# EAGLE board ZED-F9P FeatherWing Paste (EAGLE 9.4.1)
REV: C

Size 50.8 x 22.86 mm. Coordinates in mm from the lower left corner, seen from the top.
Outline: 48.26,22.86 arc-90 50.8,20.32 50.8,2.54 arc-90 48.26,0
Copper layers (1*16): Top 0.018mm / dielectric 1.55mm / Bottom 0.018mm
Design rules "Multi-CB_2L_125um-Tracks_OL35um *": minimum track width 0.125mm, minimum drill 0.2mm, track to track 0.125mm, track to pad 0.125mm, pad to pad 0.125mm, via to via 0.125mm, smd to smd 0mil, copper to edge 0.2mm, drill to drill 0.2mm, minimum pad ring 0.125mm, minimum via ring 0.125mm, stop-mask expansion 2mil, vias tented up to drill 0.45mm, thermal gap 0.2mm
Net classes: 2 3.3V: width 0.508 mm

## Footprints (pad centres in the part's own frame; a part is rotated, then mirrored left to right if it is on the bottom)
SOLDERJUMPER_ARROW_NOPASTE = smd 0.762 x 1.524: 1 -1.016,0; 2 1.016,0
1X01 = drill 1.016 pad 1.93 octagon: 1 0,0
0805-NO = smd 1.24 x 1.5: 1 -0.95,0; 2 0.95,0
0603 = smd 1.1 x 1: 1 -0.85,0; 2 0.85,0
MICROBUILDER_FCI_10103594_CORRECTED = smd 1.425 x 2.5: BASE@1 -0.963,1.45; BASE@2 0.963,1.45 | smd 0.4 x 1.75: D+ 0,4.525; D- -0.65,4.525; GND 1.3,4.525; ID 0.65,4.525; VBUS -1.3,4.525 | drill 0.7 pad 1.25 square: SPRT@1 -2.736,1.679; SPRT@2 2.736,1.679 | drill 0.65 pad 1.016 square: SPRT@3 -2.426,4.747; SPRT@4 2.426,4.747
SOD-323 = smd 0.63 x 0.83: A 1.15,0; C -1.15,0
FIDUCIAL_1MM = smd 1 x 1: 1 0,0
SOLDERJUMPER_CLOSEDWIRE = smd 1.168 x 1.6: 1 -0.762,0; 2 0.762,0 | smd 0.635 x 0.203: WIRE 0,0
1X02_ROUND = drill 1 pad 1.778: 1 -1.27,0; 2 1.27,0
CHIPLED_0805_NOOUTLINE = smd 1.2 x 1.2: A 0,-1.05; C 0,1.05
MICROBUILDER_FEATHERWING_HOLES = drill 1 pad 1.778: 1 6.35,1.27; 2 8.89,1.27; 3 11.43,1.27; 4 13.97,1.27; 5 16.51,1.27; 6 19.05,1.27; 7 21.59,1.27; 8 24.13,1.27; 9 26.67,1.27; 10 29.21,1.27; 11 31.75,1.27; 12 34.29,1.27; 13 36.83,1.27; 14 39.37,1.27; 15 41.91,1.27; 16 44.45,1.27; 17 44.45,21.59; 18 41.91,21.59; 19 39.37,21.59; 20 36.83,21.59; 21 34.29,21.59; 22 31.75,21.59; 23 29.21,21.59; 24 26.67,21.59; 25 24.13,21.59; 26 21.59,21.59; 27 19.05,21.59; 28 16.51,21.59 | hole 2.54: 48.26,20.32; 48.26,2.54; 2.54,20.32; 2.54,2.54
SOT23-R = smd 0.635 x 1.016: 1 -0.95,-1; 2 0.95,-1; 3 0,1
0603-NO = smd 1.075 x 1: 1 -0.85,0; 2 0.85,0
TESTPOINT_ROUND_1.5MM = smd 1.5 x 1.5: P$1 0,0
ZED-F9P_ZED-F9P = smd 0.85 x 1.52: 1 -7.15,-7.45; 2 -6.05,-7.45; 3 -4.95,-7.45; 4 -3.85,-7.45; 5 -2.75,-7.45; 6 -1.65,-7.45; 7 -0.55,-7.45; 8 0.55,-7.45; 9 1.65,-7.45; 10 2.75,-7.45; 11 3.85,-7.45; 12 4.95,-7.45; 13 6.05,-7.45; 14 7.15,-7.45; 28 7.15,7.45; 29 6.05,7.45; 30 4.95,7.45; 31 3.85,7.45; 32 2.75,7.45; 33 1.65,7.45; 34 0.55,7.45; 35 -0.55,7.45; 36 -1.65,7.45; 37 -2.75,7.45; 38 -3.85,7.45; 39 -4.95,7.45; 40 -6.05,7.45; 41 -7.15,7.45 | smd 1.52 x 0.85: 15 9.95,-6.6; 16 9.95,-5.5; 17 9.95,-4.4; 18 9.95,-3.3; 19 9.95,-2.2; 20 9.95,-1.1; 21 9.95,0; 22 9.95,1.1; 23 9.95,2.2; 24 9.95,3.3; 25 9.95,4.4; 26 9.95,5.5; 27 9.95,6.6; 42 -9.95,6.6; 43 -9.95,5.5; 44 -9.95,4.4; 45 -9.95,3.3; 46 -9.95,2.2; 47 -9.95,1.1; 48 -9.95,0; 49 -9.95,-1.1; 50 -9.95,-2.2; 51 -9.95,-3.3; 52 -9.95,-4.4; 53 -9.95,-5.5; 54 -9.95,-6.6 | smd 1.1 x 1.1: 55 -1.05,-1.05; 56 -3.15,-1.05; 57 -5.25,-1.05; 58 -7.35,-1.05; 59 -1.05,-3.1; 60 -3.15,-3.1; 61 -5.25,-3.1; 62 -7.35,-3.1; 63 -1.05,-5.15; 64 -3.15,-5.15; 65 -5.25,-5.15; 66 -7.35,-5.15; 67 -1.05,5.15; 68 -3.15,5.15; 69 -5.25,5.15; 70 -7.35,5.15; 71 -1.05,3.1; 72 -3.15,3.1; 73 -5.25,3.1; 74 -7.35,3.1; 75 -1.05,1.05; 76 -3.15,1.05; 77 -5.25,1.05; 78 -7.35,1.05; 79 1.05,1.05; 80 3.15,1.05; 81 5.25,1.05; 82 7.35,1.05; 83 1.05,3.1; 84 3.15,3.1; 85 5.25,3.1; 86 7.35,3.1; 87 1.05,5.15; 88 3.15,5.15; 89 5.25,5.15; 90 7.35,5.15; 91 1.05,-5.15; 92 3.15,-5.15; 93 5.25,-5.15; 94 7.35,-5.15; 95 1.05,-3.1; 96 3.15,-3.1; 97 5.25,-3.1; 98 7.35,-3.1; 99 1.05,-1.05; 100 3.15,-1.05; 101 5.25,-1.05; 102 7.35,-1.05
SOT23-5 = smd 0.55 x 1.2: 1 -0.95,-1.3; 2 0,-1.3; 3 0.95,-1.3; 4 0.95,1.3; 5 -0.95,1.3
CT/CN0603 = smd 1 x 1: 1 -1,0; 2 1,0

## Placement (x,y rotation side)
3.3V  [SOLDERJUMPER_ARROW_NOPASTE]  8.73,4.6 90 bottom
3V3  [1X01]  1.27,12.7 0 bottom
C1  10uF  [0805-NO]  16.2,4.54 90 top
C2  100nF  [0805-NO]  18.68,4.54 90 top
C3  10nF  [0805-NO]  48.58,17.62 0 top
C4  1.0uF  [0603]  8.1,5.08 180 top
CON1  [MICROBUILDER_FCI_10103594_CORRECTED]  9.53,22.86 180 top
CTS  [1X01]  1.27,15.26 0 bottom
D1  0.5A/40V/420mV  [SOD-323]  14.13,4.45 270 top
D2  0.5A/40V/420mV  [SOD-323]  3.65,15.72 270 top
FID1  FIDUCIAL""  [FIDUCIAL_1MM]  4.67,21.65 0 top
FID2  FIDUCIAL""  [FIDUCIAL_1MM]  46.51,1.06 0 top
GND  [1X01]  1.27,17.78 0 bottom
INT  [SOLDERJUMPER_CLOSEDWIRE]  21.75,4.32 270 bottom
JP5  [1X02_ROUND]  17.78,15.24 0 top
L1  27nH  [0805-NO]  45.24,13.78 270 top
LED1  RED  [CHIPLED_0805_NOOUTLINE]  48.3,5.24 270 top
MS1  MICROBUILDER_FEATHERWINGMICROBUILDER_FEATHERWING_HOLES  [MICROBUILDER_FEATHERWING_HOLES]  0,0 0 top
Q1  DMG2305  [SOT23-R]  13.97,12.38 90 top
R1  1K  [0603-NO]  45.24,7.93 270 top
R2  10 ohm  [0805-NO]  45.24,17.61 90 top
R3  1K  [0603-NO]  19.37,18.1 270 top
R4  1K  [0603-NO]  16.83,18.1 270 top
R5  1k  [0603]  12.06,4.6 90 top
R6  100K  [0603-NO]  17.3,11.27 270 top
R7  100K  [0603-NO]  3.81,12.38 90 top
RTS  [1X01]  1.27,5.08 0 bottom
RX  [SOLDERJUMPER_CLOSEDWIRE]  42.7,4.32 270 bottom
RX2  [1X01]  1.27,10.16 0 bottom
SCL  [SOLDERJUMPER_CLOSEDWIRE]  16.83,18.1 270 bottom
SDA  [SOLDERJUMPER_CLOSEDWIRE]  19.37,18.1 270 bottom
TP1  [TESTPOINT_ROUND_1.5MM]  39.37,12.7 0 bottom
TX  [SOLDERJUMPER_CLOSEDWIRE]  40.32,4.32 270 bottom
TX2  [1X01]  1.27,7.62 0 bottom
U1  ZED-F9P_ZED-F9P  [ZED-F9P_ZED-F9P]  32.38,11.43 180 top
U2  SPX3819-3.3  [SOT23-5]  14.13,8.57 180 top
Z1  CG0603MLC-05E  [CT/CN0603]  6.35,16.03 180 top
Z2  CG0603MLC-05E  [CT/CN0603]  10.79,16.03 0 top
Z3  CG0603MLC-05E  [CT/CN0603]  6.35,14.45 0 top
Z4  CG0603MLC-05E  [CT/CN0603]  10.79,14.45 180 top

## Library data of the parts
3.3V FID1 FID2 = microbuilder; BOM: EXCLUDE
3V3 CTS GND RTS RX2 TX2 = adafruit
C1-C3 INT JP5 L1 LED1 Q1 R1-R4 R6 R7 RX SCL SDA TP1 TX U2 = microbuilder
C4 = SparkFun-Capacitors; PROD_ID: CAP-00868
CON1 = Iridium_9603_Beacon
D1 D2 = SparkFun-DiscreteSemi; PROD_ID: DIO-10955
MS1 = NEO-M8T GNSS FeatherWing
R5 = SparkFun-Resistors; PROD_ID: RES-07856
U1 = Qwiic GPS-RTK2 - ublox ZED-F9P
Z1-Z4 = Protezione; MONTHLY_USAGE: _____; PART_NUMBER: BRNCG0603MLC-05E; PRICE: _____; SUPPLIER: _____; TYPE: Protezione

## Nets
GND: CON1.BASE@1 CON1.BASE@2 CON1.GND CON1.SPRT@1 CON1.SPRT@2 CON1.SPRT@3 CON1.SPRT@4 MS1.4 U2.2
IN: U2.1
VBAT: Q1.3
VBUS: CON1.VBUS

## Tracks (layer width: path | path; a pad name or v marks a point on that pad's centre or on a via)
GND  (8 unrouted)

## Text on the board
Top: TOP
Bottom: BOT
bPlace: SCL | SDA | ZED-F9P | SCL | SDA | GNSS | SAFEBOOT | FeatherWing | 3V3 | RST | GND